# EAGLE board six4mix_power_panel (EAGLE 6.6.0)
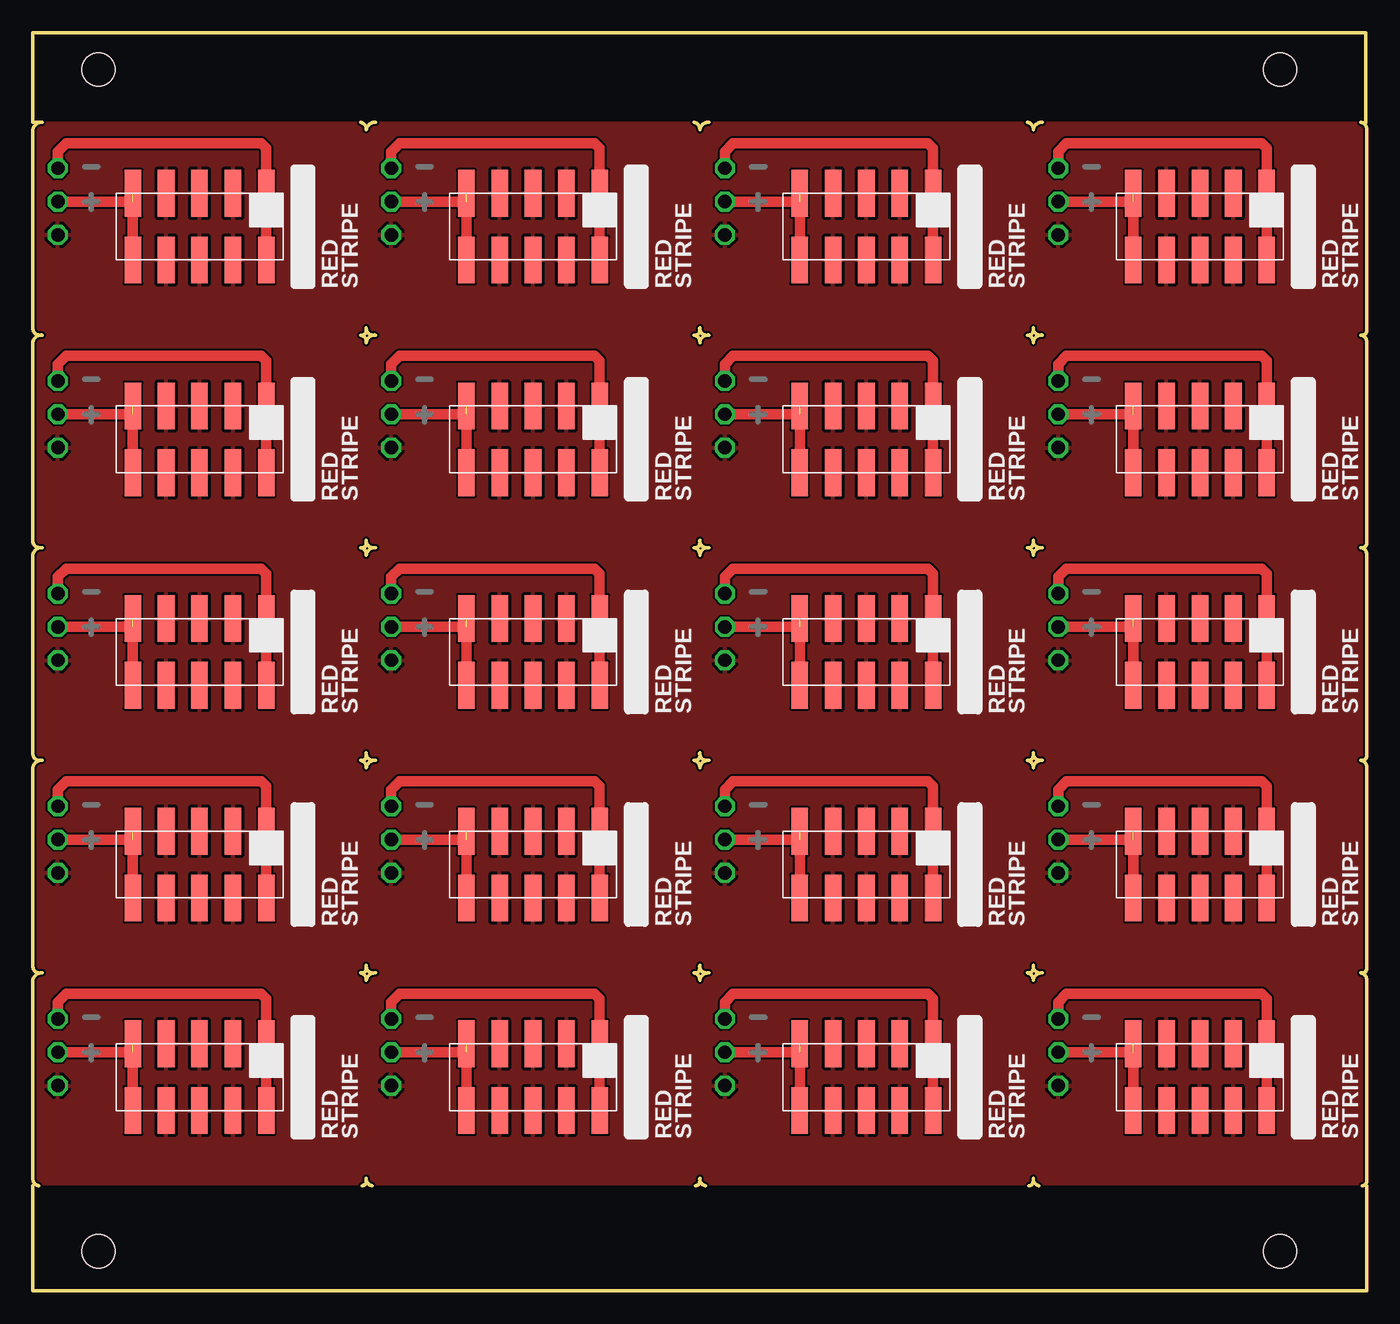
[diagram p0: board, top side]
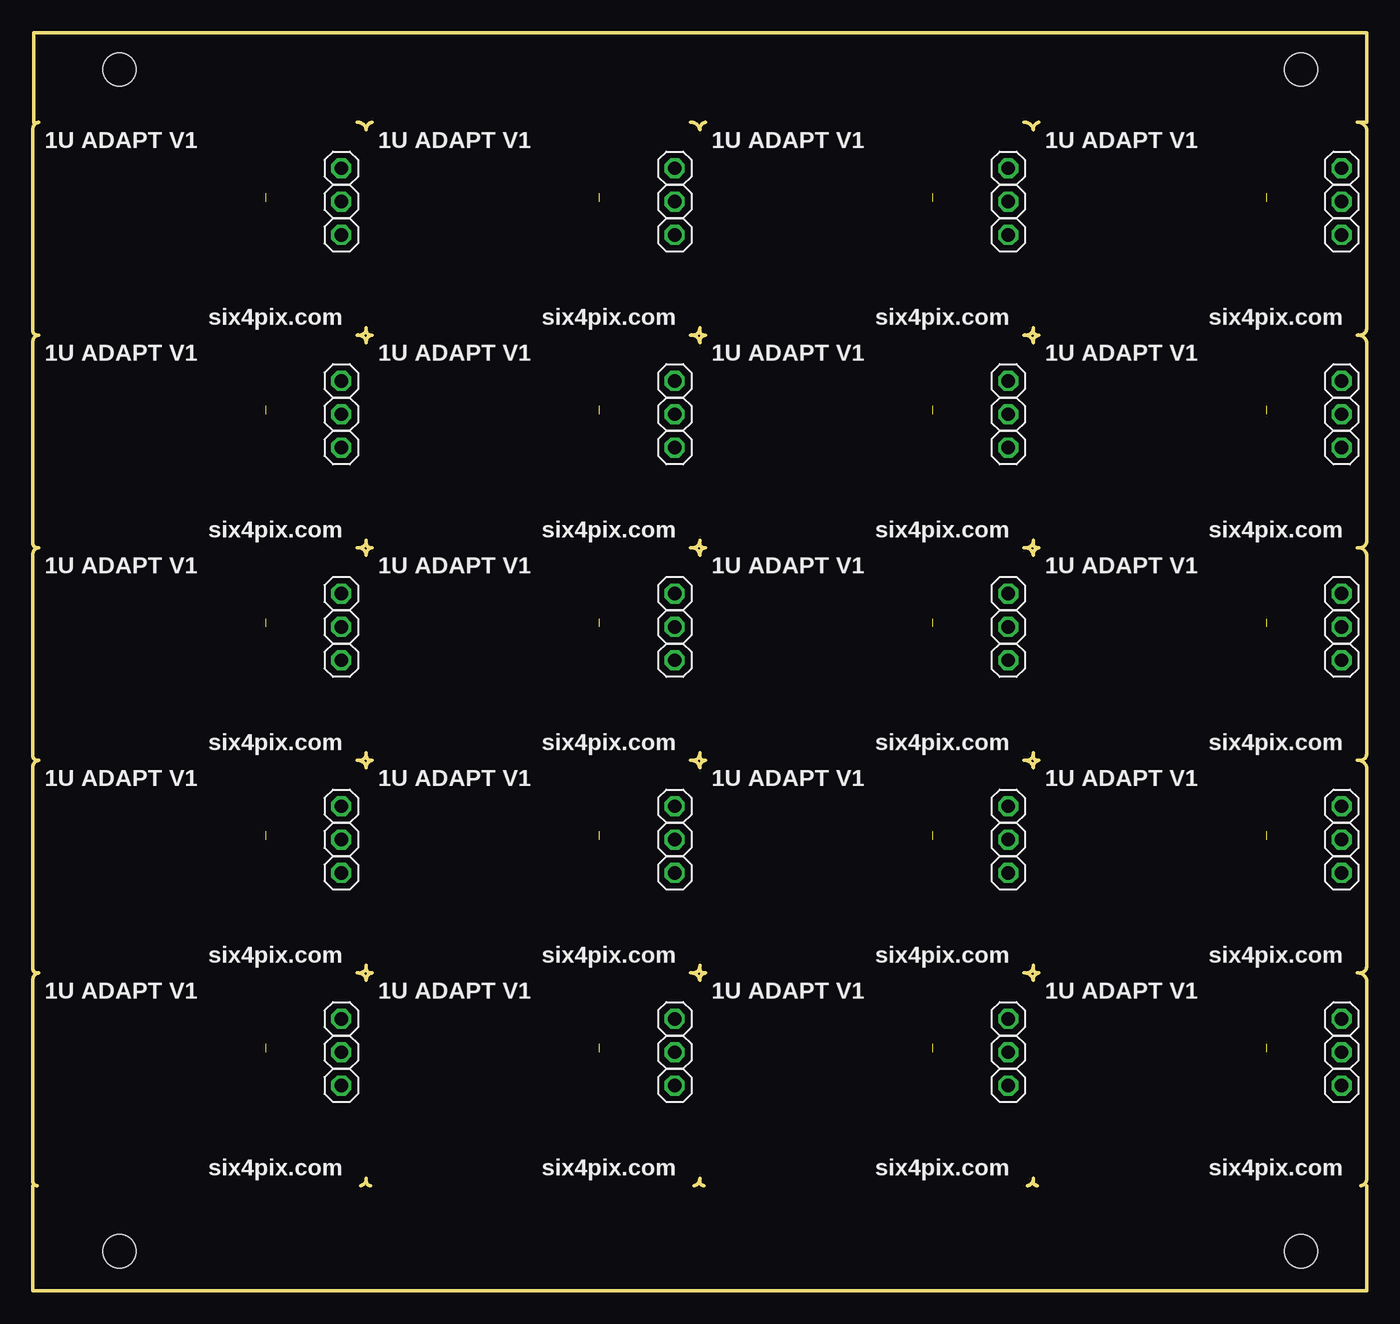
[diagram p1: board, bottom side, seen from below]

Size 101.61 x 95.78 mm. Coordinates in mm from the lower left corner, seen from the top.
Outline: 0.45,8 arc-90 0,8.57 0,23.62 arc-90 0.7,24.19
Outline: 24.96,24.19 arc-90 25.4,23.62
Outline: 25.4,23.68 25.4,23.62
Outline: 25.4,8.32 arc-90 25.09,8
Outline: 0.45,24.19 arc-90 0,24.76 0,39.81 arc-90 0.7,40.38
Outline: 24.96,40.38 arc-90 25.4,39.81
Outline: 25.4,39.88 25.4,39.81
Outline: 25.4,24.51 arc-90 25.09,24.19
Outline: 0.45,40.38 arc-90 0,40.96 0,56.01 arc-90 0.7,56.58
Outline: 24.96,56.58 arc-90 25.4,56.01
Outline: 25.4,56.07 25.4,56.01
Outline: 25.4,40.7 arc-90 25.09,40.38
Outline: 0.45,56.58 arc-90 0,57.15 0,72.2 arc-90 0.7,72.77
Outline: 24.96,72.77 arc-90 25.4,72.2
Outline: 25.4,72.26 25.4,72.2
Outline: 25.4,56.9 arc-90 25.09,56.58
Outline: 0.45,72.77 arc-90 0,73.34 0,88.39 arc-90 0.7,88.96
Outline: 24.96,88.96 arc-90 25.4,88.39
Outline: 25.4,88.45 25.4,88.39
Outline: 25.4,73.09 arc-90 25.09,72.77
Outline: 25.4,8.57 arc90 25.85,8
Outline: 25.4,23.62 arc-90 26.1,24.19
Outline: 50.36,24.19 arc-90 50.8,23.62
Outline: 50.8,23.68 50.8,23.62
Outline: 50.8,8.32 arc-90 50.49,8
Outline: 25.4,24.76 arc90 25.85,24.19
Outline: 25.4,39.81 arc-90 26.1,40.38
Outline: 50.36,40.38 arc-90 50.8,39.81
Outline: 50.8,39.88 50.8,39.81
Outline: 50.8,24.51 arc-90 50.49,24.19
Outline: 25.4,40.96 arc90 25.85,40.38
Outline: 25.4,56.01 arc-90 26.1,56.58
Outline: 50.36,56.58 arc-90 50.8,56.01
Outline: 50.8,56.07 50.8,56.01
Outline: 50.8,40.7 arc-90 50.49,40.38
Outline: 25.4,57.15 arc90 25.85,56.58
Outline: 25.4,72.2 arc-90 26.1,72.77
Outline: 50.36,72.77 arc-90 50.8,72.2
Outline: 50.8,72.26 50.8,72.2
Outline: 50.8,56.9 arc-90 50.49,56.58
Outline: 25.4,73.34 arc90 25.85,72.77
Outline: 25.4,88.39 arc-90 26.1,88.96
Outline: 50.36,88.96 arc-90 50.8,88.39
Outline: 50.8,88.45 50.8,88.39
Outline: 50.8,73.09 arc-90 50.49,72.77
Outline: 50.8,8.57 arc90 51.25,8
Outline: 50.8,23.62 arc-90 51.5,24.19
Outline: 75.76,24.19 arc-90 76.2,23.62
Outline: 76.2,23.68 76.2,23.62
Outline: 76.2,8.32 arc-90 75.89,8
Outline: 50.8,24.76 arc90 51.25,24.19
Outline: 50.8,39.81 arc-90 51.5,40.38
Outline: 75.76,40.38 arc-90 76.2,39.81
Outline: 76.2,39.88 76.2,39.81
Outline: 76.2,24.51 arc-90 75.89,24.19
Outline: 50.8,40.96 arc90 51.25,40.38
Outline: 50.8,56.01 arc-90 51.5,56.58
Outline: 75.76,56.58 arc-90 76.2,56.01
Outline: 76.2,56.07 76.2,56.01
Outline: 76.2,40.7 arc-90 75.89,40.38
Outline: 50.8,57.15 arc90 51.25,56.58
Outline: 50.8,72.2 arc-90 51.5,72.77
Outline: 75.76,72.77 arc-90 76.2,72.2
Outline: 76.2,72.26 76.2,72.2
Outline: 76.2,56.9 arc-90 75.89,56.58
Outline: 50.8,73.34 arc90 51.25,72.77
Outline: 50.8,88.39 arc-90 51.5,88.96
Outline: 75.76,88.96 arc-90 76.2,88.39
Outline: 76.2,88.45 76.2,88.39
Outline: 76.2,73.09 arc-90 75.89,72.77
Outline: 76.2,23.62 arc-90 76.9,24.19 arc90 76.2,23.62
Outline: 101.6,23.62 arc90 101.16,24.19 arc-90 101.6,23.62
Outline: 101.6,23.62 101.6,8.32
Outline: 101.6,8.32 arc-90 101.29,8 arc90 101.6,8.32
Outline: 76.2,39.81 arc-90 76.9,40.38 arc90 76.2,39.81
Outline: 101.6,39.81 101.6,24.51
Outline: 101.6,24.51 arc-90 101.29,24.19 arc90 101.6,24.51
Outline: 76.2,56.01 arc-90 76.9,56.58 arc90 76.2,56.01
Outline: 101.6,56.01 101.6,40.7 arc-90 101.29,40.38
Outline: 76.2,72.2 arc-90 76.9,72.77 arc90 76.2,72.2
Outline: 101.6,72.2 101.6,56.9 arc-90 101.29,56.58
Outline: 76.2,88.39 arc-90 76.9,88.96 arc90 76.2,88.39
Outline: 101.6,88.39 arc90 101.16,88.96 arc-90 101.6,88.39
Outline: 101.6,88.39 101.6,73.09 arc-90 101.29,72.77
Outline: 0,8 0,0 101.6,0 101.6,8
Outline: 0.66,88.97 0,88.97 0,95.78 101.53,95.78 101.53,88.95 101.25,88.95
Outline: 101.6,23.68 101.6,23.62
Outline: 101.16,40.38 arc-90 101.6,39.81
Outline: 101.6,39.88 101.6,39.81
Outline: 101.16,56.58 arc-90 101.6,56.01
Outline: 101.6,56.07 101.6,56.01
Outline: 101.16,72.77 arc-90 101.6,72.2
Outline: 101.6,72.26 101.6,72.2
Outline: 101.6,88.45 101.6,88.39
Outline: 76.2,8.57 arc90 76.65,8 arc-90 76.2,8.57
Outline: 76.2,24.76 arc90 76.65,24.19 arc-90 76.2,24.76
Outline: 76.2,40.96 arc90 76.65,40.38 arc-90 76.2,40.96
Outline: 76.2,57.15 arc90 76.65,56.58 arc-90 76.2,57.15
Outline: 76.2,73.34 arc90 76.65,72.77 arc-90 76.2,73.34
Copper layers (1*16): Top 0.035mm / dielectric 1.5mm / Bottom 0.035mm
Design rules "hackvana": minimum track width 6mil, minimum drill 0.3mm, track to track 6mil, track to pad 9mil, pad to pad 6mil, via to via 6mil, smd to smd 0mil, copper to edge 6mil, drill to drill 6mil, minimum pad ring 10mil, minimum via ring 6mil, stop-mask expansion 2mil, vias tented up to drill 100mil, thermal gap 10mil
Holes 2.54 mm at 5,3 95,3 5,93 95,93

## Footprints (pad centres in the part's own frame; a part is rotated, then mirrored left to right if it is on the bottom)
1X01 = drill 1.016 octagon: 1 0,0
2X5SMT = smd 3.56 x 1.27: 1 -2.54,5.08; 2 -2.54,2.54; 3 -2.54,0; 4 -2.54,-2.54; 5 -2.54,-5.08; 6 2.54,-5.08; 7 2.54,-2.54; 8 2.54,0; 9 2.54,2.54; 10 2.54,5.08

## Placement (x,y rotation side)
+1  [1X01]  1.91,34.35 0 bottom
+2  [1X01]  1.91,50.55 0 bottom
+3  [1X01]  1.91,66.74 0 bottom
+4  [1X01]  1.91,82.93 0 bottom
+5  [1X01]  27.31,18.16 0 bottom
+6  [1X01]  27.31,34.35 0 bottom
+7  [1X01]  27.31,50.55 0 bottom
+8  [1X01]  27.31,66.74 0 bottom
+9  [1X01]  27.31,82.93 0 bottom
+10  [1X01]  52.71,18.16 0 bottom
+11  [1X01]  52.71,34.35 0 bottom
+12  [1X01]  1.91,18.16 0 bottom
+13  [1X01]  52.71,50.55 0 bottom
+14  [1X01]  52.71,66.74 0 bottom
+15  [1X01]  52.71,82.93 0 bottom
+16  [1X01]  78.11,18.16 0 bottom
+17  [1X01]  78.11,34.35 0 bottom
+18  [1X01]  78.11,50.55 0 bottom
+19  [1X01]  78.11,66.74 0 bottom
+20  [1X01]  78.11,82.93 0 bottom
-1  [1X01]  1.91,36.89 0 bottom
-2  [1X01]  1.91,53.09 0 bottom
-3  [1X01]  1.91,69.28 0 bottom
-4  [1X01]  1.91,85.47 0 bottom
-5  [1X01]  27.31,20.7 0 bottom
-6  [1X01]  27.31,36.89 0 bottom
-7  [1X01]  27.31,53.09 0 bottom
-8  [1X01]  27.31,69.28 0 bottom
-9  [1X01]  27.31,85.47 0 bottom
-10  [1X01]  52.71,20.7 0 bottom
-11  [1X01]  52.71,36.89 0 bottom
-12  [1X01]  1.91,20.7 0 bottom
-13  [1X01]  52.71,53.09 0 bottom
-14  [1X01]  52.71,69.28 0 bottom
-15  [1X01]  52.71,85.47 0 bottom
-16  [1X01]  78.11,20.7 0 bottom
-17  [1X01]  78.11,36.89 0 bottom
-18  [1X01]  78.11,53.09 0 bottom
-19  [1X01]  78.11,69.28 0 bottom
-20  [1X01]  78.11,85.47 0 bottom
GND  [1X01]  1.91,15.62 0 bottom
GND1  [1X01]  1.91,31.81 0 bottom
GND2  [1X01]  1.91,48.01 0 bottom
GND3  [1X01]  1.91,64.2 0 bottom
GND4  [1X01]  1.91,80.39 0 bottom
GND5  [1X01]  27.31,15.62 0 bottom
GND6  [1X01]  27.31,31.81 0 bottom
GND7  [1X01]  27.31,48.01 0 bottom
GND8  [1X01]  27.31,64.2 0 bottom
GND9  [1X01]  27.31,80.39 0 bottom
GND10  [1X01]  52.71,15.62 0 bottom
GND11  [1X01]  52.71,31.81 0 bottom
GND12  [1X01]  52.71,48.01 0 bottom
GND13  [1X01]  52.71,64.2 0 bottom
GND14  [1X01]  52.71,80.39 0 bottom
GND15  [1X01]  78.11,15.62 0 bottom
GND16  [1X01]  78.11,31.81 0 bottom
GND17  [1X01]  78.11,48.01 0 bottom
GND18  [1X01]  78.11,64.2 0 bottom
GND19  [1X01]  78.11,80.39 0 bottom
U$1  2X5SMT  [2X5SMT]  12.7,16.26 270 top
U$2  2X5SMT  [2X5SMT]  12.7,32.45 270 top
U$3  2X5SMT  [2X5SMT]  12.7,48.64 270 top
U$4  2X5SMT  [2X5SMT]  12.7,64.83 270 top
U$5  2X5SMT  [2X5SMT]  12.7,81.03 270 top
U$6  2X5SMT  [2X5SMT]  38.1,16.26 270 top
U$7  2X5SMT  [2X5SMT]  38.1,32.45 270 top
U$8  2X5SMT  [2X5SMT]  38.1,48.64 270 top
U$9  2X5SMT  [2X5SMT]  38.1,64.83 270 top
U$10  2X5SMT  [2X5SMT]  38.1,81.03 270 top
U$11  2X5SMT  [2X5SMT]  63.5,16.26 270 top
U$12  2X5SMT  [2X5SMT]  63.5,32.45 270 top
U$13  2X5SMT  [2X5SMT]  63.5,48.64 270 top
U$14  2X5SMT  [2X5SMT]  63.5,64.83 270 top
U$15  2X5SMT  [2X5SMT]  63.5,81.03 270 top
U$16  2X5SMT  [2X5SMT]  88.9,16.26 270 top
U$17  2X5SMT  [2X5SMT]  88.9,32.45 270 top
U$18  2X5SMT  [2X5SMT]  88.9,48.64 270 top
U$19  2X5SMT  [2X5SMT]  88.9,64.83 270 top
U$20  2X5SMT  [2X5SMT]  88.9,81.03 270 top

## Library data of the parts
+1-+20 -1--20 GND GND1-GND19 = pinhead
U$1-U$20 = jason_eagle6

## Nets
GND: GND.1 U$1.2 U$1.3 U$1.4 U$1.7 U$1.8 U$1.9
GND1: GND1.1 U$2.2 U$2.3 U$2.4 U$2.7 U$2.8 U$2.9
GND2: GND2.1 U$3.2 U$3.3 U$3.4 U$3.7 U$3.8 U$3.9
GND3: GND3.1 U$4.2 U$4.3 U$4.4 U$4.7 U$4.8 U$4.9
GND4: GND4.1 U$5.2 U$5.3 U$5.4 U$5.7 U$5.8 U$5.9
GND5: GND5.1 U$6.2 U$6.3 U$6.4 U$6.7 U$6.8 U$6.9
GND6: GND6.1 U$7.2 U$7.3 U$7.4 U$7.7 U$7.8 U$7.9
GND7: GND7.1 U$8.2 U$8.3 U$8.4 U$8.7 U$8.8 U$8.9
GND8: GND8.1 U$9.2 U$9.3 U$9.4 U$9.7 U$9.8 U$9.9
GND9: GND9.1 U$10.2 U$10.3 U$10.4 U$10.7 U$10.8 U$10.9
GND10: GND10.1 U$11.2 U$11.3 U$11.4 U$11.7 U$11.8 U$11.9
GND11: GND11.1 U$12.2 U$12.3 U$12.4 U$12.7 U$12.8 U$12.9
GND12: GND12.1 U$13.2 U$13.3 U$13.4 U$13.7 U$13.8 U$13.9
GND13: GND13.1 U$14.2 U$14.3 U$14.4 U$14.7 U$14.8 U$14.9
GND14: GND14.1 U$15.2 U$15.3 U$15.4 U$15.7 U$15.8 U$15.9
GND15: GND15.1 U$16.2 U$16.3 U$16.4 U$16.7 U$16.8 U$16.9
GND16: GND16.1 U$17.2 U$17.3 U$17.4 U$17.7 U$17.8 U$17.9
GND17: GND17.1 U$18.2 U$18.3 U$18.4 U$18.7 U$18.8 U$18.9
GND18: GND18.1 U$19.2 U$19.3 U$19.4 U$19.7 U$19.8 U$19.9
GND19: GND19.1 U$20.2 U$20.3 U$20.4 U$20.7 U$20.8 U$20.9
N$1: -12.1 U$1.1 U$1.10
N$2: +12.1 U$1.5 U$1.6
N$3: -1.1 U$2.1 U$2.10
N$4: +1.1 U$2.5 U$2.6
N$5: -2.1 U$3.1 U$3.10
N$6: +2.1 U$3.5 U$3.6
N$7: -3.1 U$4.1 U$4.10
N$8: +3.1 U$4.5 U$4.6
N$9: -4.1 U$5.1 U$5.10
N$10: +4.1 U$5.5 U$5.6
N$11: -5.1 U$6.1 U$6.10
N$12: +5.1 U$6.5 U$6.6
N$13: -6.1 U$7.1 U$7.10
N$14: +6.1 U$7.5 U$7.6
N$15: -7.1 U$8.1 U$8.10
N$16: +7.1 U$8.5 U$8.6
N$17: -8.1 U$9.1 U$9.10
N$18: +8.1 U$9.5 U$9.6
N$19: -9.1 U$10.1 U$10.10
N$20: +9.1 U$10.5 U$10.6
N$21: -10.1 U$11.1 U$11.10
N$22: +10.1 U$11.5 U$11.6
N$23: -11.1 U$12.1 U$12.10
N$24: +11.1 U$12.5 U$12.6
N$25: -13.1 U$13.1 U$13.10
N$26: +13.1 U$13.5 U$13.6
N$27: -14.1 U$14.1 U$14.10
N$28: +14.1 U$14.5 U$14.6
N$29: -15.1 U$15.1 U$15.10
N$30: +15.1 U$15.5 U$15.6
N$31: -16.1 U$16.1 U$16.10
N$32: +16.1 U$16.5 U$16.6
N$33: -17.1 U$17.1 U$17.10
N$34: +17.1 U$17.5 U$17.6
N$35: -18.1 U$18.1 U$18.10
N$36: +18.1 U$18.5 U$18.6
N$37: -19.1 U$19.1 U$19.10
N$38: +19.1 U$19.5 U$19.6
N$39: -20.1 U$20.1 U$20.10
N$40: +20.1 U$20.5 U$20.6

## Tracks (layer width: path | path; a pad name or v marks a point on that pad's centre or on a via)
GND
  pour Top: 0.26,24.13 25.4,24.13 25.4,8.13 0.26,8.13
GND1
  pour Top: 0.26,40.32 25.4,40.32 25.4,24.32 0.26,24.32
GND2
  pour Top: 0.26,56.51 25.4,56.51 25.4,40.51 0.26,40.51
GND3
  pour Top: 0.26,72.71 25.4,72.71 25.4,56.7 0.26,56.7
GND4
  pour Top: 0.26,88.9 25.4,88.9 25.4,72.9 0.26,72.9
GND5
  pour Top: 25.66,24.13 50.8,24.13 50.8,8.13 25.66,8.13
GND6
  pour Top: 25.66,40.32 50.8,40.32 50.8,24.32 25.66,24.32
GND7
  pour Top: 25.66,56.51 50.8,56.51 50.8,40.51 25.66,40.51
GND8
  pour Top: 25.66,72.71 50.8,72.71 50.8,56.7 25.66,56.7
GND9
  pour Top: 25.66,88.9 50.8,88.9 50.8,72.9 25.66,72.9
GND10
  pour Top: 51.06,24.13 76.2,24.13 76.2,8.13 51.06,8.13
GND11
  pour Top: 51.06,40.32 76.2,40.32 76.2,24.32 51.06,24.32
GND12
  pour Top: 51.06,56.51 76.2,56.51 76.2,40.51 51.06,40.51
GND13
  pour Top: 51.06,72.71 76.2,72.71 76.2,56.7 51.06,56.7
GND14
  pour Top: 51.06,88.9 76.2,88.9 76.2,72.9 51.06,72.9
GND15
  pour Top: 76.46,24.13 101.6,24.13 101.6,8.13 76.46,8.13
GND16
  pour Top: 76.46,40.32 101.6,40.32 101.6,24.32 76.46,24.32
GND17
  pour Top: 76.46,56.51 101.6,56.51 101.6,40.51 76.46,40.51
GND18
  pour Top: 76.46,72.71 101.6,72.71 101.6,56.7 76.46,56.7
GND19
  pour Top: 76.46,88.9 101.6,88.9 101.6,72.9 76.46,72.9
N$1
  Top 0.813: -12.1 1.91,21.97 2.54,22.61 17.4,22.61 17.78,22.22 U$1.1 U$1.10
N$2  (1 unrouted)
  Top 0.813: +12.1 7.62,18.16 U$1.6
N$3
  Top 0.813: -1.1 1.91,38.16 2.54,38.8 17.4,38.8 17.78,38.42 U$2.1 U$2.10
N$4  (1 unrouted)
  Top 0.813: +1.1 7.62,34.35 U$2.6
N$5
  Top 0.813: -2.1 1.91,54.35 2.54,54.99 17.4,54.99 17.78,54.61 U$3.1 U$3.10
N$6  (1 unrouted)
  Top 0.813: +2.1 7.62,50.55 U$3.6
N$7
  Top 0.813: -3.1 1.91,70.55 2.54,71.18 17.4,71.18 17.78,70.8 U$4.1 U$4.10
N$8  (1 unrouted)
  Top 0.813: +3.1 7.62,66.74 U$4.6
N$9
  Top 0.813: -4.1 1.91,86.74 2.54,87.38 17.4,87.38 17.78,86.99 U$5.1 U$5.10
N$10  (1 unrouted)
  Top 0.813: +4.1 7.62,82.93 U$5.6
N$11
  Top 0.813: -5.1 27.31,21.97 27.94,22.61 42.8,22.61 43.18,22.22 U$6.1 U$6.10
N$12  (1 unrouted)
  Top 0.813: +5.1 33.02,18.16 U$6.6
N$13
  Top 0.813: -6.1 27.31,38.16 27.94,38.8 42.8,38.8 43.18,38.42 U$7.1 U$7.10
N$14  (1 unrouted)
  Top 0.813: +6.1 33.02,34.35 U$7.6
N$15
  Top 0.813: -7.1 27.31,54.35 27.94,54.99 42.8,54.99 43.18,54.61 U$8.1 U$8.10
N$16  (1 unrouted)
  Top 0.813: +7.1 33.02,50.55 U$8.6
N$17
  Top 0.813: -8.1 27.31,70.55 27.94,71.18 42.8,71.18 43.18,70.8 U$9.1 U$9.10
N$18  (1 unrouted)
  Top 0.813: +8.1 33.02,66.74 U$9.6
N$19
  Top 0.813: -9.1 27.31,86.74 27.94,87.38 42.8,87.38 43.18,86.99 U$10.1 U$10.10
N$20  (1 unrouted)
  Top 0.813: +9.1 33.02,82.93 U$10.6
N$21
  Top 0.813: -10.1 52.71,21.97 53.34,22.61 68.2,22.61 68.58,22.22 U$11.1 U$11.10
N$22  (1 unrouted)
  Top 0.813: +10.1 58.42,18.16 U$11.6
N$23
  Top 0.813: -11.1 52.71,38.16 53.34,38.8 68.2,38.8 68.58,38.42 U$12.1 U$12.10
N$24  (1 unrouted)
  Top 0.813: +11.1 58.42,34.35 U$12.6
N$25
  Top 0.813: -13.1 52.71,54.35 53.34,54.99 68.2,54.99 68.58,54.61 U$13.1 U$13.10
N$26  (1 unrouted)
  Top 0.813: +13.1 58.42,50.55 U$13.6
N$27
  Top 0.813: -14.1 52.71,70.55 53.34,71.18 68.2,71.18 68.58,70.8 U$14.1 U$14.10
N$28  (1 unrouted)
  Top 0.813: +14.1 58.42,66.74 U$14.6
N$29
  Top 0.813: -15.1 52.71,86.74 53.34,87.38 68.2,87.38 68.58,86.99 U$15.1 U$15.10
N$30  (1 unrouted)
  Top 0.813: +15.1 58.42,82.93 U$15.6
N$31
  Top 0.813: -16.1 78.11,21.97 78.74,22.61 93.6,22.61 93.98,22.22 U$16.1 U$16.10
N$32  (1 unrouted)
  Top 0.813: +16.1 83.82,18.16 U$16.6
N$33
  Top 0.813: -17.1 78.11,38.16 78.74,38.8 93.6,38.8 93.98,38.42 U$17.1 U$17.10
N$34  (1 unrouted)
  Top 0.813: +17.1 83.82,34.35 U$17.6
N$35
  Top 0.813: -18.1 78.11,54.35 78.74,54.99 93.6,54.99 93.98,54.61 U$18.1 U$18.10
N$36  (1 unrouted)
  Top 0.813: +18.1 83.82,50.55 U$18.6
N$37
  Top 0.813: -19.1 78.11,70.55 78.74,71.18 93.6,71.18 93.98,70.8 U$19.1 U$19.10
N$38  (1 unrouted)
  Top 0.813: +19.1 83.82,66.74 U$19.6
N$39
  Top 0.813: -20.1 78.11,86.74 78.74,87.38 93.6,87.38 93.98,86.99 U$20.1 U$20.10
N$40  (1 unrouted)
  Top 0.813: +20.1 83.82,82.93 U$20.6

## Text on the board
tPlace: RED | STRIPE | RED | STRIPE | RED | STRIPE | RED | STRIPE | RED | STRIPE | RED | STRIPE | RED | STRIPE | RED | STRIPE | RED | STRIPE | RED | STRIPE | RED | STRIPE | RED | STRIPE | RED | STRIPE | RED | STRIPE | RED | STRIPE | RED | STRIPE | RED | STRIPE | RED | STRIPE | RED | STRIPE | RED | STRIPE
bPlace: 1U ADAPT V1 | 1U ADAPT V1 | 1U ADAPT V1 | 1U ADAPT V1 | six4pix.com | six4pix.com | six4pix.com | six4pix.com | 1U ADAPT V1 | 1U ADAPT V1 | 1U ADAPT V1 | 1U ADAPT V1 | six4pix.com | six4pix.com | six4pix.com | six4pix.com | 1U ADAPT V1 | 1U ADAPT V1 | 1U ADAPT V1 | 1U ADAPT V1 | six4pix.com | six4pix.com | six4pix.com | six4pix.com | 1U ADAPT V1 | 1U ADAPT V1 | 1U ADAPT V1 | 1U ADAPT V1 | six4pix.com | six4pix.com | six4pix.com | six4pix.com | 1U ADAPT V1 | 1U ADAPT V1 | 1U ADAPT V1 | 1U ADAPT V1 | six4pix.com | six4pix.com | six4pix.com | six4pix.com
tDocu: GD | GD | GD | GD | GD | GD | GD | GD | GD | GD | GD | GD | GD | GD | GD | GD | GD | GD | GD | GD